# EAGLE board metal_detector (EAGLE 9.7.0)
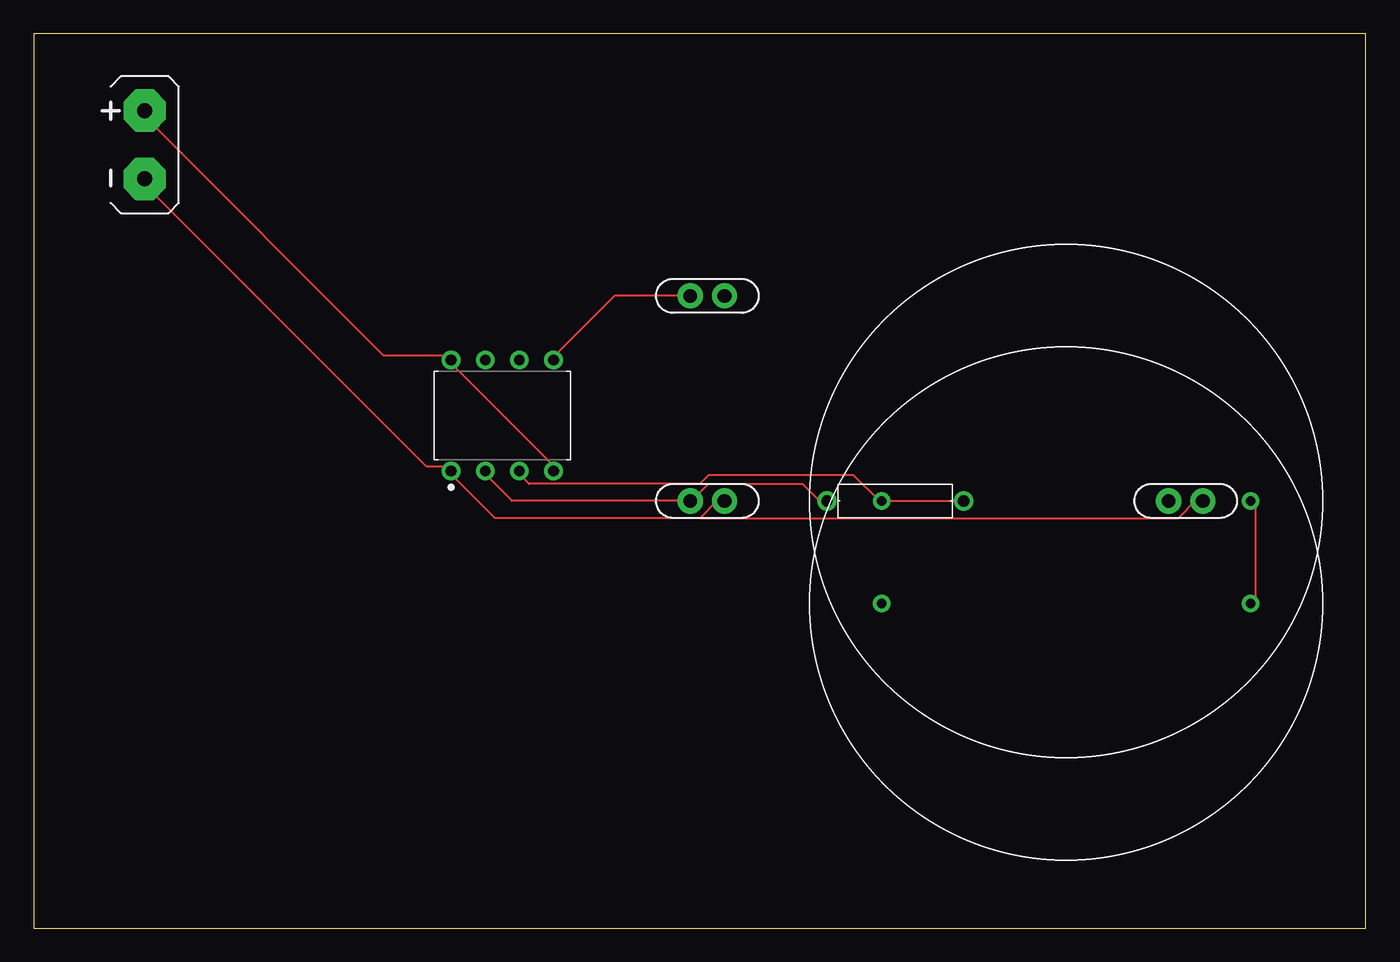
[diagram p0: board, top side]
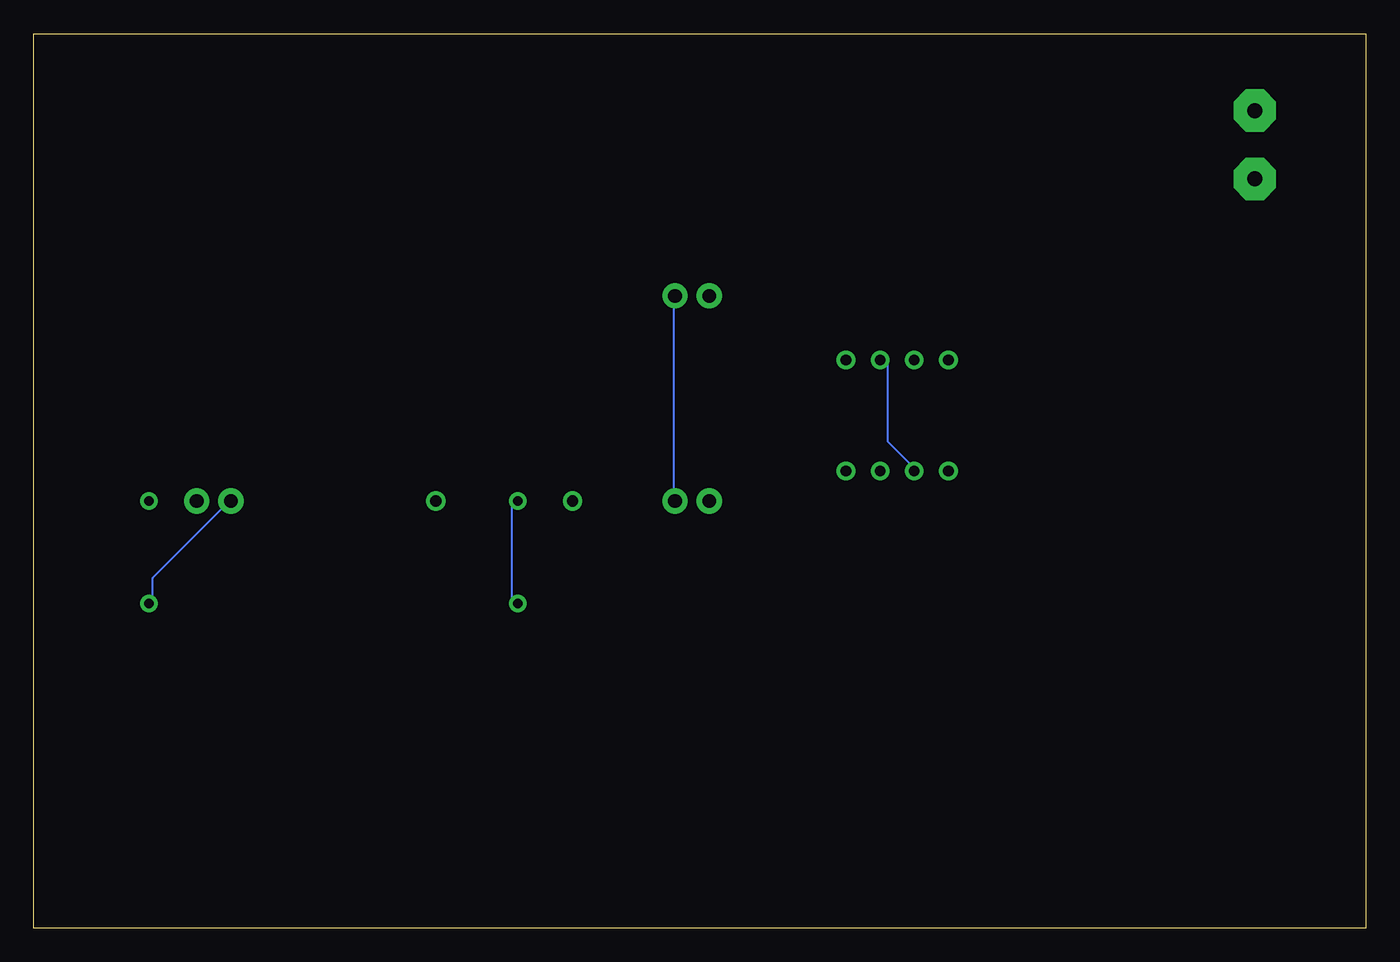
[diagram p1: board, bottom side, seen from below]

Size 99.04 x 66.48 mm. Coordinates in mm from the lower left corner, seen from the top.
Outline: 0,0 99.04,0 99.04,66.47 0,66.47 0,0
Copper layers (1*16): Top 0.035mm / dielectric 1.5mm / Bottom 0.035mm
Design rules "default": minimum track width 6mil, minimum drill 0.35mm, track to track 6mil, track to pad 6mil, pad to pad 6mil, via to via 6mil, smd to smd 6mil, copper to edge 40mil, drill to drill 6mil, minimum pad ring 10mil, minimum via ring 8mil, stop-mask expansion 4mil, vias tented up to drill 0mil, thermal gap 10mil

## Footprints (pad centres in the part's own frame; a part is rotated, then mirrored left to right if it is on the bottom)
BATTERY-GENERIC = drill 1.118 pad 3.15 octagon: + 2.54,0; - -2.54,0
CAP-THRU-2.54MM = drill 1.016 pad 1.88: 1 -1.27,0; 2 1.27,0
INDRD2743W50D3810H2616B = drill 0.708 pad 1.308: 1 -13.716,0; 2 13.716,0
RESAD1016W63L850D250B = drill 0.83 pad 1.43: 1 -5.08,0; 2 5.08,0
DIP826W53P254L959H508Q8B = drill 0.786 pad 1.386: 1 -4.13,3.81; 2 -4.13,1.27; 3 -4.13,-1.27; 4 -4.13,-3.81; 5 4.13,-3.81; 6 4.13,-1.27; 7 4.13,1.27; 8 4.13,3.81

## Placement (x,y rotation side)
BAT1  9V  [BATTERY-GENERIC]  8.26,58.22 90 top
C1  10n  [CAP-THRU-2.54MM]  50.08,31.75 0 top
C2  100n  [CAP-THRU-2.54MM]  50.08,46.99 180 top
C3  1u  [CAP-THRU-2.54MM]  85.64,31.75 0 top
LRECEIVER  470u  [INDRD2743W50D3810H2616B]  76.75,24.13 0 top
LSENDER  470u  [INDRD2743W50D3810H2616B]  76.75,31.75 0 top
R1  2.2k  [RESAD1016W63L850D250B]  64.05,31.75 0 top
U1  LM555_DIP  [DIP826W53P254L959H508Q8B]  34.84,38.1 90 top

## Library data of the parts
BAT1 C1-C3 R1 = Tinkercad
LRECEIVER LSENDER = Tinkercad; CATEGORY: Inductor; SUB-CATEGORY: Fixed
U1 = Tinkercad; CATEGORY: IC_Clock-Timing; CURRENT-SUPPLY: 10mA; DESCRIPTION: IC OSC SINGLE TIMER 100KHZ 8-DIP; FREQUENCY: 100kHz; MANUFACTURER: Texas Instruments; MPN: LM555CN/NOPB; OPERATING_TEMP: 0°C to 70°C; PART_STATUS: Active; ROHS_COMPLIANT: ROHS3 Compliant; SUB-CATEGORY: Timer

## Nets
BAT1+: BAT1.+ U1.4 U1.8
BAT1-: BAT1.- C1.2 C2.1 C3.2 U1.1
C3_1: C3.1 LRECEIVER.2 LSENDER.2
U1_CV: C2.2 U1.5
U1_OUT: LRECEIVER.1 LSENDER.1 R1.2 U1.3
U1_THR: C1.1 R1.1 U1.2 U1.6

## Tracks (layer width: path | path; a pad name or v marks a point on that pad's centre or on a via)
BAT1+
  Top 0.152: U1.4 38.73,34.29 31.11,41.91 U1.8 30.48,42.55 26.04,42.55 8.26,60.33 BAT1.+
BAT1-
  Top 0.152: 49.53,30.48 34.29,30.48 31.11,33.66 U1.1 30.48,34.29 29.21,34.29 8.26,55.24 BAT1.- | 49.53,30.48 50.8,31.75 C1.2 | 49.53,30.48 85.09,30.48 86.36,31.75 C3.2
  Bottom 0.152: C2.1 51.44,46.99 51.44,31.75 C1.2
C3_1
  Top 0.152: LRECEIVER.2 90.81,24.13 90.81,31.75 LSENDER.2
  Bottom 0.152: C3.1 84.45,31.75 90.17,26.04 90.17,24.13 LRECEIVER.2
U1_CV
  Top 0.152: C2.2 43.18,46.99 38.73,42.55 U1.5
U1_OUT
  Top 0.152: U1.3 36.2,33.66 36.83,33.02 49.53,33.02 50.16,33.66 60.96,33.66 62.87,31.75 LSENDER.1 R1.2
  Bottom 0.152: LRECEIVER.1 63.5,24.13 63.5,31.75 LSENDER.1
U1_THR
  Top 0.152: R1.1 58.42,31.75 57.15,33.02 50.16,33.02 48.9,31.75 C1.1 35.56,31.75 33.66,33.66 U1.2
  Bottom 0.152: U1.2 33.66,34.29 35.56,36.2 35.56,41.91 U1.6